# EAGLE board Centerboard - Prototype 1 (EAGLE 7.2.0)
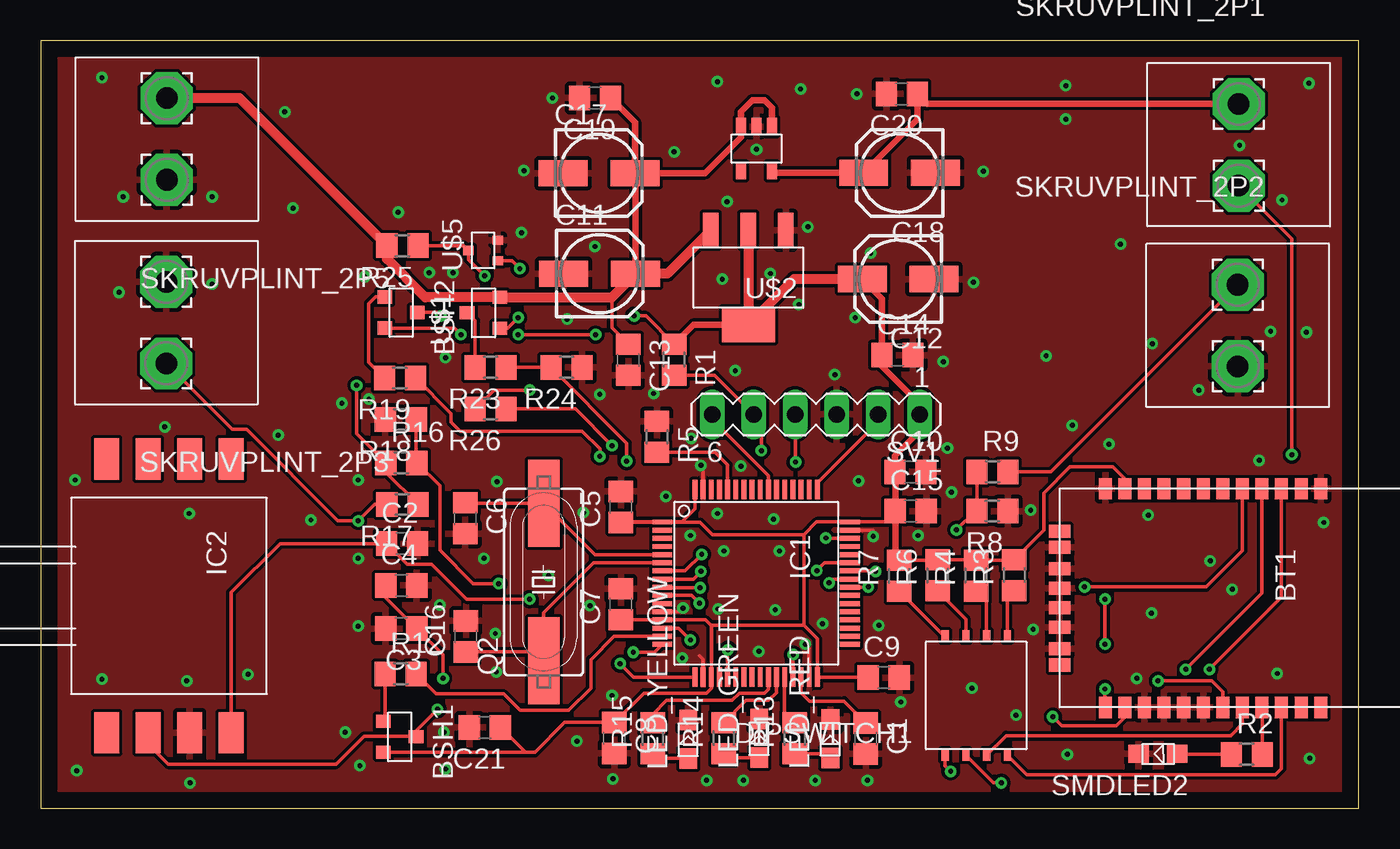
[diagram p0: board, top side]
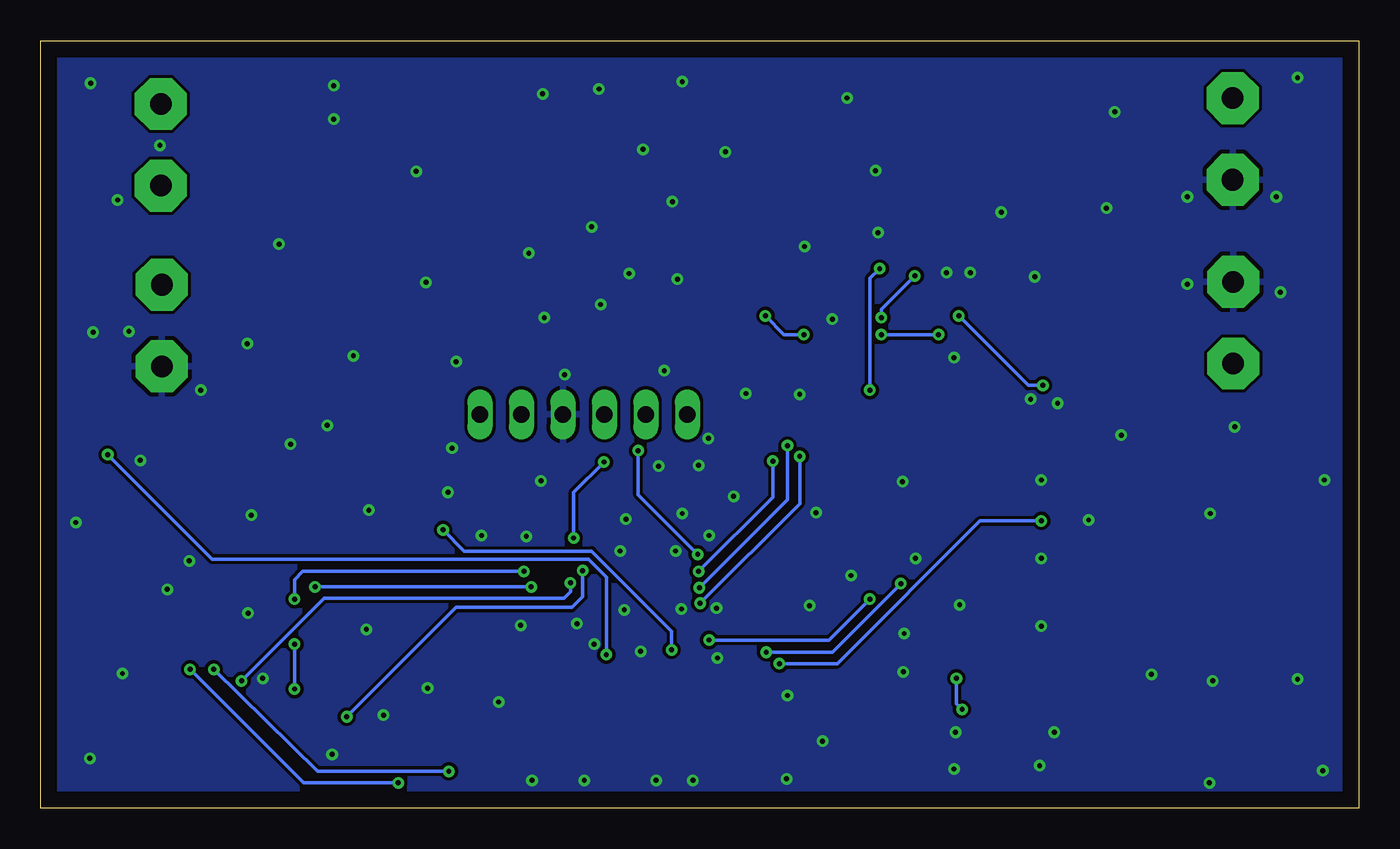
[diagram p1: board, bottom side, seen from below]

Size 80.75 x 47 mm. Coordinates in mm from the lower left corner, seen from the top.
Outline: 0,0 80.75,0 80.75,47 0,47 0,0
Copper layers (1*16): Top 0.035mm / dielectric 1.5mm / Bottom 0.035mm
Design rules "default *": minimum track width 0.2mm, minimum drill 0.3mm, track to track 0.2mm, track to pad 0.2mm, pad to pad 0.2mm, via to via 0.2mm, smd to smd 0mil, copper to edge 40mil, drill to drill 8mil, minimum pad ring 10mil, minimum via ring 8mil, stop-mask expansion 4mil, vias tented up to drill 0mil, thermal gap 10mil

## Footprints (pad centres in the part's own frame; a part is rotated, then mirrored left to right if it is on the bottom)
P-CHANNEL = smd 0.8 x 0.9: DRAIN 0,1; GATE -0.95,-1; SOURCE 0.95,-1
RN42 = smd 1.3 x 0.8: 1 -6.7,3.2; 2 -6.7,2; 3 -6.7,0.8; 4 -6.7,-0.4; 5 -6.7,-1.6; 6 -6.7,-2.8; 7 -6.7,-4; 8 -6.7,-5.2; 9 -6.7,-6.4; 10 -6.7,-7.6; 11 -6.7,-8.8; 12 -6.7,-10; 13 6.7,-10; 14 6.7,-8.8; 15 6.7,-7.6; 16 6.7,-6.4; 17 6.7,-5.2; 18 6.7,-4; 19 6.7,-2.8; 20 6.7,-1.6; 21 6.7,-0.4; 22 6.7,0.8; 23 6.7,2; 24 6.7,3.2 | smd 0.8 x 1.3: 28 3.1,-12.8; 29 -3.1,-12.8; 30 4.1,-12.8; 31 1.8,-12.8; 32 0.6,-12.8; 33 -0.6,-12.8; 34 -1.8,-12.8; 35 -4.1,-12.8
C0805 = smd 1.3 x 1.5: 1 -0.95,0; 2 0.95,0
153CLV-0505 = smd 3 x 1.6: + 2.2,0; - -2.2,0
DIPSWITCH4P = smd 0.44 x 0.7: B1 0,0; B2 1.27,0; B3 2.54,0; B4 3.81,0; T1 0,7.3; T2 1.27,7.3; T3 2.54,7.3; T4 3.81,7.3
LQFP64 = smd 0.3 x 1.2: 1 -3.75,-5.75; 2 -3.25,-5.75; 3 -2.75,-5.75; 4 -2.25,-5.75; 5 -1.75,-5.75; 6 -1.25,-5.75; 7 -0.75,-5.75; 8 -0.25,-5.75; 9 0.25,-5.75; 10 0.75,-5.75; 11 1.25,-5.75; 12 1.75,-5.75; 13 2.25,-5.75; 14 2.75,-5.75; 15 3.25,-5.75; 16 3.75,-5.75; 33 3.75,5.75; 34 3.25,5.75; 35 2.75,5.75; 36 2.25,5.75; 37 1.75,5.75; 38 1.25,5.75; 39 0.75,5.75; 40 0.25,5.75; 41 -0.25,5.75; 42 -0.75,5.75; 43 -1.25,5.75; 44 -1.75,5.75; 45 -2.25,5.75; 46 -2.75,5.75; 47 -3.25,5.75; 48 -3.75,5.75 | smd 1.2 x 0.3: 17 5.75,-3.75; 18 5.75,-3.25; 19 5.75,-2.75; 20 5.75,-2.25; 21 5.75,-1.75; 22 5.75,-1.25; 23 5.75,-0.75; 24 5.75,-0.25; 25 5.75,0.25; 26 5.75,0.75; 27 5.75,1.25; 28 5.75,1.75; 29 5.75,2.25; 30 5.75,2.75; 31 5.75,3.25; 32 5.75,3.75; 49 -5.75,3.75; 50 -5.75,3.25; 51 -5.75,2.75; 52 -5.75,2.25; 53 -5.75,1.75; 54 -5.75,1.25; 55 -5.75,0.75; 56 -5.75,0.25; 57 -5.75,-0.25; 58 -5.75,-0.75; 59 -5.75,-1.25; 60 -5.75,-1.75; 61 -5.75,-2.25; 62 -5.75,-2.75; 63 -5.75,-3.25; 64 -5.75,-3.75
CASE1351 = smd 2.54 x 1.52: P$1 8.38,-5.08; P$2 8.38,-2.54; P$3 8.38,0; P$4 8.38,2.54; P$5 -8.38,2.54; P$6 -8.38,0; P$7 -8.38,-2.54; P$8 -8.38,-5.08
TPS76150DBVT = smd 0.6 x 1.05: EN 0.95,-1.35; GND 0,-1.35; IN -0.95,-1.35; NC 0.95,1.35; OUT -0.95,1.35
SMD_LED_CUSTOM = smd 1.25 x 1.1: 1 0,0; 2 2.35,0
HC49UP = smd 5.334 x 1.93: 1 -4.826,0; 2 4.826,0
R0805 = smd 1.3 x 1.5: 1 -0.95,0; 2 0.95,0
SKRUVPLINT_2P = drill 1.321 pad 3.175 octagon: 3 0,5; 4 0,0
MA06-1 = drill 1.016 long: 1 -6.35,0; 2 -3.81,0; 3 -1.27,0; 4 1.27,0; 5 3.81,0; 6 6.35,0
SOT-223 = smd 0.95 x 2.15: GND -2.3,-2.9; INPUT 2.3,-2.9; OUTPUT 0,-2.9 | smd 3.25 x 2.15: VOUT 0,2.9
SOT-323 = smd 0.559 x 0.648: DRAIN 0,0.895; GATE -0.623,-0.895; SOURCE 0.623,-0.895

## Placement (x,y rotation side)
BSH1  ZXMP10A13F  [P-CHANNEL]  21.99,4.37 270 top
BSH2  ZXMP10A13F  [P-CHANNEL]  22.08,30.36 270 top
BT1  BLUETOOTH-RN42  [RN42]  75.22,12.87 270 top
C1  4u7  [C0805]  50.55,4.27 270 top
C2  470pF  [C0805]  22.14,16.2 0 top
C3  1uF  [C0805]  22.09,11 180 top
C4  0.01uF  [C0805]  22.09,13.65 0 top
C5  100n  [C0805]  35.55,18.45 90 top
C6  25p  [C0805]  26,17.75 270 top
C7  100n  [C0805]  35.55,12.49 90 top
C8  100n  [C0805]  35.15,4.3 270 top
C9  100n  [C0805]  51.65,8 0 top
C10  100n  [C0805]  53.29,20.6 0 top
C11  10u  [153CLV-0505]  34.24,32.74 0 top
C12  10u  [153CLV-0505]  52.53,32.41 180 top
C13  100n  [C0805]  36,27.46 270 top
C14  100n  [C0805]  52.49,27.75 0 top
C15  100n  [C0805]  53.3,18.2 0 top
C16  25p  [C0805]  26.05,10.52 90 top
C17  10u  [153CLV-0505]  34.2,38.89 0 top
C18  10u  [153CLV-0505]  52.62,38.91 180 top
C19  100n  [C0805]  33.96,43.5 180 top
C20  100n  [C0805]  52.76,43.75 180 top
C21  1u  [C0805]  27.21,4.95 180 top
DIPSWITCH1  DIPSWITCH_4P  [DIPSWITCH4P]  59.22,10.55 180 top
IC1  STM32F401RBT  [LQFP64]  43.83,13.78 270 top
IC2  MP3V5010  [CASE1351]  9.12,13 270 top
IC3  TPS76150DBVT  [TPS76150DBVT]  43.85,40.4 180 top
LED_GREEN  SMD_LED  [SMD_LED_CUSTOM]  44.02,3.1 90 top
LED_RED  SMD_LED  [SMD_LED_CUSTOM]  48.37,3.08 90 top
LED_YELLOW  SMD_LED  [SMD_LED_CUSTOM]  39.67,3.05 90 top
Q2  18p  [HC49UP]  30.81,13.85 90 top
R1  10k  [R0805]  38.8,27.47 270 top
R2  220  [R0805]  73.89,3.3 0 top
R3  1k  [R0805]  59.65,14.27 90 top
R4  1k  [R0805]  57.3,14.24 90 top
R5  10k  [R0805]  37.75,22.75 270 top
R6  1k  [R0805]  54.95,14.26 90 top
R7  1k  [R0805]  52.6,14.23 90 top
R8  1k  [R0805]  58.3,18.2 180 top
R9  680  [R0805]  58.31,20.6 0 top
R12  1k  [R0805]  22.05,8.23 0 top
R13  220  [R0805]  46.2,4.29 90 top
R14  220  [R0805]  41.85,4.29 90 top
R15  220  [R0805]  37.5,4.29 90 top
R16  350  [R0805]  22.09,21.15 0 top
R17  350  [R0805]  22.16,18.6 180 top
R18  350  [R0805]  22.06,23.8 180 top
R19  1k  [R0805]  22.01,26.35 180 top
R23  6.8k  [R0805]  27.56,27 180 top
R24  3.3k  [R0805]  32.21,27 180 top
R25  10k  [R0805]  22.16,34.45 180 top
R26  1k  [R0805]  27.56,24.45 180 top
SKRUVPLINT_2P1  SKRUVPLINT_2P  [SKRUVPLINT_2P]  73.4,43.13 180 top
SKRUVPLINT_2P2  SKRUVPLINT_2P  [SKRUVPLINT_2P]  73.34,32.06 180 top
SKRUVPLINT_2P3  SKRUVPLINT_2P  [SKRUVPLINT_2P]  7.69,27.24 0 top
SKRUVPLINT_2P5  SKRUVPLINT_2P  [SKRUVPLINT_2P]  7.72,38.49 0 top
SMDLED2  SMD_LED  [SMD_LED_CUSTOM]  69.61,3.32 180 top
SV1  [MA06-1]  47.49,24.12 180 top
U$1  ZXMP10A13F  [P-CHANNEL]  27.12,30.34 90 top
U$2  LM1117  [SOT-223]  43.35,32.5 180 top
U$5  SI1330EDL  [SOT-323]  27.1,34.16 90 top

## Library data of the parts
BSH1 BSH2 U$1 = ZXMP10A13F
BT1 = RN42
C1-C21 R1 R5 R8 R9 R12 R16-R19 R23-R26 = rcl
DIPSWITCH1 = dipswitch4p
IC1 = E7020E
IC2 = MP3V5010DP
IC3 = TPS76150DBVT
LED_GREEN LED_RED LED_YELLOW SMDLED2 = greenled_smd
Q2 = crystal; OC_FARNELL: unknown; OC_NEWARK: unknown
R2-R4 R6 R7 R13-R15 = resistor
SKRUVPLINT_2P1-SKRUVPLINT_2P3 SKRUVPLINT_2P5 = skruvplint2p_CTB0700
SV1 = E7020E; OC_FARNELL: unknown; OC_NEWARK: unknown
U$2 = LM1117
U$5 = SI1330EDL

## Nets
+3V3: BSH1.SOURCE BSH2.SOURCE BT1.11 C5.1 C7.1 C8.1 C9.1 C10.1 C12.+ C14.1 C15.1 C21.1 IC1.1 IC1.13 IC1.19 IC1.32 IC1.48 IC1.64 R1.1 R3.2 R4.2 R6.2 R7.2 SV1.1 U$2.OUTPUT U$2.VOUT
+5V: C18.+ C20.1 IC3.OUT SKRUVPLINT_2P1.4
BAT_MEAS: IC1.8 R23.1 R24.2
BATMEAS_ON/OFF: IC1.9 R26.1
BT1_CONNSTAT: BT1.19 IC1.41
BT1_GPIO3: BT1.20 DIPSWITCH1.T2
BT1_GPIO4: BT1.22 DIPSWITCH1.T1
BT1_GPIO6: BT1.3 DIPSWITCH1.T3
BT1_GPIO7: BT1.4 DIPSWITCH1.T4
BT1_RESET: BT1.5 IC1.40
BT1_USART1_RX: BT1.14 IC1.43
BT1_USART1_TX: BT1.13 IC1.42
GND: BT1.1 BT1.12 BT1.15 BT1.16 BT1.17 BT1.18 BT1.28 BT1.29 BT1.31 BT1.32 BT1.33 BT1.34 C1.2 C2.2 C3.2 C4.2 C5.2 C6.2 C7.2 C8.2 C9.2 C10.2 C11.- C12.- C13.2 C14.2 C15.2 C16.2 C17.- C18.- C19.2 C20.2 C21.2 IC1.12 IC1.18 IC1.31 IC1.47 IC1.63 IC2.P$3 IC3.GND LED_GREEN.2 LED_RED.2 LED_YELLOW.2 R5.1 R8.1 R18.2 R24.1 SKRUVPLINT_2P2.3 SKRUVPLINT_2P3.3 SKRUVPLINT_2P5.4 SMDLED2.2 SV1.3 U$2.GND U$5.SOURCE
GPIO_ULTRA_INPUT: IC1.21 R8.2 R9.1
GPIO_ULTRA_TRIGGER: IC1.29 SKRUVPLINT_2P1.3
LED_GREEN: IC1.27 R14.2
LED_RED: IC1.28 R13.2
LED_YELLOW: IC1.26 R15.2
N$1: C1.1 IC1.30
N$2: IC1.60 R5.2
N$3: LED_RED.1 R13.1
N$4: BT1.21 R2.2
N$5: DIPSWITCH1.B1 R3.1
N$6: DIPSWITCH1.B2 R4.1
N$7: DIPSWITCH1.B3 R6.1
N$8: C6.1 IC1.5 Q2.2
N$9: C16.1 IC1.6 Q2.1
N$10: DIPSWITCH1.B4 R7.1
N$11: R2.1 SMDLED2.1
N$12: R9.2 SKRUVPLINT_2P2.4
N$14: BSH1.DRAIN C3.1 C4.1 IC2.P$2
N$15: BSH1.GATE R12.1
N$16: LED_GREEN.1 R14.1
N$17: LED_YELLOW.1 R15.1
N$18: BSH2.DRAIN R16.1 R17.1
N$19: BSH2.GATE R19.2
N$22: C11.+ C13.1 C17.+ C19.1 IC3.EN IC3.IN R25.2 SKRUVPLINT_2P5.3 U$1.SOURCE U$2.INPUT
N$25: R23.2 U$1.DRAIN
N$26: R25.1 U$1.GATE U$5.DRAIN
N$27: R26.2 U$5.GATE
NRST: IC1.7 R1.2 SV1.5
PRESSURE_ADC: C2.1 IC1.14 IC2.P$4
PRESSURE_ON/OFF: IC1.15 R12.2
STRAIN_ADC1: IC1.16 R16.2 R18.1
STRAIN_ADC2: IC1.17 R17.2 SKRUVPLINT_2P3.4
STRAIN_ON/OFF: IC1.10 R19.1
SWCLK: IC1.49 SV1.2
SWDIO: IC1.46 SV1.4
SWO: IC1.55 SV1.6

## Tracks (layer width: path | path; a pad name or v marks a point on that pad's centre or on a via)
+3V3  (via drill 0.3)
  Top 0.2: IC1.64 40.08,18.33 39.28,17.53 IC1.1 35.58,17.53 C5.1 40.4,17.5 41.15,16.75 46.75,16.75 | C15.1 51.68,17.53 IC1.48 47.53,17.53 46.75,16.75 | 52.35,15.43 R7.2 54.92,15.18 R6.2 57.28,15.21 R4.2 59.62,15.19 R3.2 61.45,17.02 61.45,19.3 63.05,20.9 65.7,20.9 66.42,20.18 BT1.11 | BSH1.SOURCE 29.69,3.42 | 29.69,3.42 30.27,3.42 32.1,5.25 C8.1 36.95,7.05 40.8,7.05 41.08,7.33 IC1.19 41.08,11.17 | C9.1 50.67,8.03 IC1.32 47.58,10.37 46.75,11.2 | 46.75,11.2 41.11,11.2 41.08,11.17 | 46.75,11.2 46.75,16.75 | C7.1 IC1.13 40.72,11.53 41.08,11.17 | C21.1 29.69,3.42 | R1.1 37.07,30.15 v36.35,30.15 | v25.75,29 25.34,29.41 BSH2.SOURCE | v34,29 v29.25,29
  Top 0.4: C12.+ 51.54,31.2 C14.1 51.54,27.06 53.84,24.76 SV1.1 53.84,23.09 52.34,21.59 C10.1 C15.1 52.35,15.43 | U$2.VOUT 39.98,29.6 R1.1
  Top 0.6: U$2.OUTPUT U$2.VOUT 46.16,32.41 C12.+
  Bottom 0.2: v36.35,30.15 35.2,29 v34,29 | v29.25,29 v25.75,29
+5V
  Top 0.4: SKRUVPLINT_2P1.4 54.33,43.13 C20.1 53.71,42.2 C18.+ 44.94,38.91 IC3.OUT
BAT_MEAS  (via drill 0.3)
  Top 0.2: R23.1 R24.2 35.9,22.36 v35.9,21.25 | v40.45,14.5 39.98,14.03 IC1.8
  Bottom 0.2: v35.9,21.25 35.9,19.05 v40.45,14.5
BATMEAS_ON/OFF  (via drill 0.3)
  Top 0.2: R26.1 32.75,24.45 v35,22.2 | v40.4,13.5 38.11,13.5 IC1.9
  Bottom 0.2: v35,22.2 35,18.9 v40.4,13.5
BT1_CONNSTAT  (via drill 0.3)
  Top 0.2: IC1.41 48.53,14.03 v48.3,13.8 | v68.45,7.8 71.75,7.8 72.42,7.13 BT1.19
  Bottom 0.2: v48.3,13.8 48.3,13.25 48.7,12.85 63.4,12.85 v68.45,7.8
BT1_GPIO3
  Top 0.2: BT1.20 73.62,5.17 72.9,4.45 59.15,4.45 DIPSWITCH1.T2
BT1_GPIO4
  Top 0.2: BT1.22 76.02,2.42 75.65,2.05 60.42,2.05 DIPSWITCH1.T1
BT1_GPIO6  (via drill 0.3)
  Top 0.2: DIPSWITCH1.T3 58.38,1.55 v58.85,1.55 | v71.6,8.5 76.02,12.92 BT1.3
  Bottom 0.2: v58.85,1.55 64.65,1.55 v71.6,8.5
BT1_GPIO7  (via drill 0.3)
  Top 0.2: DIPSWITCH1.T4 55.41,2.59 v55.75,2.25 | v70.15,8.5 74.82,13.17 BT1.4
  Bottom 0.2: v55.75,2.25 63.8,2.25 v70.15,8.5
BT1_RESET  (via drill 0.3)
  Top 0.2: IC1.40 50.68,13.53 v50.7,13.55 | v63.95,13.55 71.4,13.55 73.62,15.77 BT1.5
  Bottom 0.2: v50.7,13.55 v63.95,13.55
BT1_USART1_RX  (via drill 0.3)
  Top 0.2: BT1.14 66.42,5.57 65.9,5.05 62.55,5.05 v62,5.6 | v47.55,14.55 48.03,15.03 IC1.43
  Bottom 0.2: v62,5.6 55.3,12.3 48.2,12.3 47.55,12.95 v47.55,14.55
BT1_USART1_TX  (via drill 0.3)
  Top 0.2: IC1.42 51.12,14.53 v51.15,14.5 | v65.2,12.8 v65.2,10.05 | v65.2,7.3 65.2,6.19 BT1.13
  Bottom 0.2: v51.15,14.5 64.7,14.5 65.2,14 v65.2,12.8 | v65.2,10.05 v65.2,7.3
GND  (via drill 0.3)
  Top 0.2: IC1.12 39.13,12.03 v39.35,12.25 | IC1.47 51,17.03 v51,16.65 | IC1.18 40.58,9.12 40.35,9.35 | IC1.63 40.58,20.87 v40.45,21 | IC1.31 47.08,9.82 v46.85,10.05
  other vias: 10.5,32.1 10.5,37.45 5.05,37.45 4.8,31.6 14.95,42.65 15.45,36.75 21.9,36.5 29.45,35.25 29.6,39.05 31.35,43.5 38.8,40.2 42.05,37.15 43.85,40.35 46.55,44.05 50,43.75 57.75,39 57.15,32.2 55.3,27.35 48.65,26.55 44.7,32.75 37.55,25.4 34.25,25.35 55.55,22.05 55.8,19.35 60.65,18.25 65.45,22.3 62.8,44.25 62.8,42.2 73.45,40.6 77.55,29.15 75.35,29.2 70.95,25.6 68.1,28.45 66.15,34.55 61.6,27.7 63.2,23.45 67.85,17.95 78.6,17.5 68.05,11.95 41.5,12.2 41.45,18.05 44.9,17.7 47.9,11.3 44,9.6 39.3,9.2 35,6.9 45,12.15 38.3,19.1 33.65,12.4 31.1,14.25 27.15,15.3 27.95,20 33.25,18.1 20.1,25.05 18.45,24.8 19.45,20.1 16.55,17.65 19.45,15.3 24.45,12.45 19.45,11.15 18.65,4.65 19.55,2.6 24.7,4.65 24.8,2.4 35.05,1.8 32.85,4.1 40.8,1.7 43.05,1.7 50.65,1.7 47.45,1.7 52.7,6.5 51.35,11.2 57.05,7.35 60.8,10.95 67.15,7.95 62.9,3.3 77.75,3.05 75.75,8.25 71.65,15.15 73,13.4 74.65,21.3 50.1,20.05 47,35.6 49.9,30.05 41.45,44.5 33.95,34.4 32.25,29.95 25.25,32.8 24.8,27.6 27.85,10.7 27.9,8.35 8.95,7.8 9.15,1.55 3.75,7.9 12.7,8.2 9.1,18.05 14.55,22.85 7.6,23.35 2.1,20.1 19.85,32.55 23.8,32.8 3.75,44.75 2.2,2.3 77.7,44.4 76.05,37.25 50.85,34 41.75,32.4 46.45,30.85 42.9,20.95 39.85,22.65 39.8,16.7 42.55,26.8 53.75,16.7 45.25,15.75 41.85,15.75 59.75,5.7
  pour Top: 0,80 100,80 100,0 0,0
  pour Bottom: 0,80 100,80 100,0 0,0
GPIO_ULTRA_INPUT  (via drill 0.3)
  Top 0.2: R9.1 R8.2 57.25,18.2 v56.1,17.05 | v42.1,9.7 42.08,9.68 IC1.21
  Bottom 0.2: v56.1,17.05 54.8,15.75 47,15.75 42.1,10.85 v42.1,9.7
GPIO_ULTRA_TRIGGER  (via drill 0.3)
  Top 0.2: IC1.29 46.1,8.05 v46.1,9.4 | v76.65,21.65 76.65,34.88 SKRUVPLINT_2P1.3
  Bottom 0.2: v46.1,9.4 46.1,14.15 47.2,15.25 70.25,15.25 v76.65,21.65
LED_GREEN
  Top 0.2: IC1.27 45.08,7.08 44.6,6.6 43.21,6.6 R14.2
LED_RED
  Top 0.2: IC1.28 45.58,5.86 R13.2
LED_YELLOW
  Top 0.2: IC1.26 44.58,7.28 44.35,7.05 42.8,7.05 42.35,6.6 38.35,6.6 37.5,5.75 R15.2
N$1
  Top 0.2: IC1.30 46.58,7.07 47.1,6.55 49.22,6.55 C1.1
N$2
  Top 0.2: IC1.60 42.08,21.02 41.3,21.8 R5.2
N$3
  Top 0.2: R13.1 48.11,3.34 LED_RED.1
N$4
  Top 0.2: R2.2 74.84,6.15 BT1.21
N$5
  Top 0.2: DIPSWITCH1.B1 59.22,12.89 R3.1
N$6
  Top 0.2: DIPSWITCH1.B2 57.95,12.64 R4.1
N$7
  Top 0.2: DIPSWITCH1.B3 56.68,11.58 R6.1
N$8
  Top 0.2: IC1.5 33.96,15.53 Q2.2 26.02,18.68 C6.1
N$9
  Top 0.2: 30.51,9.32 Q2.1 | IC1.6 33.88,15.03 30.81,11.96 Q2.1 | C16.1 30.81,9.57 Q2.1
N$10
  Top 0.2: DIPSWITCH1.B4 55.33,10.55 R7.1
N$11
  Top 0.2: R2.1 69.63,3.3 SMDLED2.1
N$12
  Top 0.2: R9.2 61.88,20.6 SKRUVPLINT_2P2.4
N$14  (via drill 0.3)
  Top 0.2: IC2.P$2 6.58,3.92 7.8,2.7 18.1,2.7 19.8,4.4 22.96,4.4 | 22.96,4.4 BSH1.DRAIN | 22.96,4.4 22.96,4.71 v24.3,6.05 | v24.65,7.95 24.65,9.39 C3.1 21.14,12.9 C4.1
  Bottom 0.2: v24.3,6.05 24.65,6.4 v24.65,7.95
N$15
  Top 0.2: R12.1 21.1,5.43 BSH1.GATE
N$16
  Top 0.2: LED_GREEN.1 42.09,3.1 R14.1
N$17
  Top 0.2: R15.1 37.79,3.05 LED_YELLOW.1
N$18  (via drill 0.3)
  Top 0.2: R17.1 21.14,20.57 R16.1 19.35,22.94 v19.35,25.9 | v24.5,30.15 24.29,30.36 BSH2.DRAIN
  Bottom 0.2: v19.35,25.9 20.25,25.9 v24.5,30.15
N$19
  Top 0.2: BSH2.GATE 20.51,31.31 20.1,30.9 20.1,27.31 R19.2
N$22
  Top 0.2: C13.1 34.99,29.42 34.99,31.29
  Top 0.4: C17.+ 40.71,38.89 42.9,41.08 IC3.EN 42.9,42.65 43.6,43.35 44.35,43.35 44.8,42.9 IC3.IN | C19.1 36.4,42.01 C17.+ | C17.+ 36.44,38.85 C11.+
  Top 0.6: SKRUVPLINT_2P5.3 12.17,43.49 R25.2 21.21,33.64 23.56,31.29 U$1.SOURCE 34.99,31.29 C11.+ 38.39,32.74 U$2.INPUT
N$25
  Top 0.2: R23.2 26.61,29.85 U$1.DRAIN
N$26  (via drill 0.3)
  Top 0.2: R25.1 25.91,34.45 U$5.DRAIN 26.2,33.6 v27.2,32.6 | v29.25,30.05 28.59,29.39 U$1.GATE
  Bottom 0.2: v27.2,32.6 29.25,30.55 v29.25,30.05
N$27  (via drill 0.3)
  Top 0.2: R26.2 27.76,25.6 v29.95,25.6 | v29.35,33.05 28.86,33.54 U$5.GATE
  Bottom 0.2: v29.95,25.6 29.95,32.45 v29.35,33.05
NRST  (via drill 0.3)
  Top 0.2: IC1.7 39.48,14.53 v40.5,15.55 | v44.15,21.9 44.15,23.65 SV1.5 41.28,26.52 R1.2
  Bottom 0.2: v40.5,15.55 44.15,19.2 v44.15,21.9
PRESSURE_ADC  (via drill 0.3)
  Top 0.2: IC2.P$4 11.66,13.21 14.65,16.2 C2.1 22.44,14.95 23.95,14.95 26.1,12.8 v29.95,12.8 | v39.8,10.3 39.07,11.03 IC1.14
  Bottom 0.2: v29.95,12.8 32.45,10.3 v39.8,10.3
PRESSURE_ON/OFF
  Top 0.2: R12.2 24.23,7 28.35,7 29.35,6 32.35,6 33.7,7.35 33.7,9.1 35.13,10.53 IC1.15
STRAIN_ADC1  (via drill 0.3)
  Top 0.2: IC1.16 37.6,9.55 v36.3,9.55 | v28.05,13.75 26.5,13.75 24.45,15.8 24.45,19.74 R16.2 23.01,21.18 R18.1
  Bottom 0.2: v36.3,9.55 32.25,9.55 v28.05,13.75
STRAIN_ADC2  (via drill 0.3)
  Top 0.2: IC1.17 36.32,8.03 v35.5,8.85 | R17.2 20.45,18.6 v19.45,17.6 18.2,17.6 12.6,23.2 11.73,23.2 SKRUVPLINT_2P3.4
  Bottom 0.2: v35.5,8.85 31.95,8.85 23.2,17.6 v19.45,17.6
STRAIN_ON/OFF  (via drill 0.3)
  Top 0.2: R19.1 25.15,24.16 25.15,23.65 25.7,23.1 33.15,23.1 34.25,22 v34.25,21.55 | v40.35,12.55 39.87,13.03 IC1.10
  Bottom 0.2: v34.25,21.55 34.25,18.65 v40.35,12.55
SWCLK
  Top 0.2: IC1.49 47.58,19.93 51.3,23.65 SV1.2
SWDIO  (via drill 0.3)
  Top 0.2: IC1.46 48.12,16.53 v48.1,16.55 | v46.25,21.2 46.25,24.09 SV1.4
  Bottom 0.2: v48.1,16.55 48.1,19.35 v46.25,21.2
SWO
  Top 0.2: IC1.55 44.58,20.37 41.14,23.81 SV1.6